# EAGLE board opk-pi-1wire-i2c (EAGLE 7.3.0)

Size 34.14 x 52.58 mm. Coordinates in mm from the lower left corner, seen from the top.
Outline: 0,0 34.14,0 34.14,52.58 0,52.58 0,0
Copper layers (1*16): Top 0.0356mm / dielectric 1.5011mm / Bottom 0.0356mm
Design rules "LaenPCBOrder": minimum track width 6mil, minimum drill 13mil, track to track 6mil, track to pad 6mil, pad to pad 6mil, via to via 6mil, smd to smd 6mil, copper to edge 15mil, drill to drill 6mil, minimum pad ring 7mil, minimum via ring 7mil, stop-mask expansion 3mil, vias tented up to drill 0mil, thermal gap 10mil
Net classes: 0 Default: width 0.203 mm; 1 vcc: width 0.203 mm

## Footprints (pad centres in the part's own frame; a part is rotated, then mirrored left to right if it is on the bottom)
SCREWTERMINAL-3.5MM-3 = drill 1.2 pad 2.413 square: 1 0,0 | drill 1.2 pad 2.413: 2 3.5,0; 3 7,0
0204/7 = drill 0.813 octagon: 1 -3.81,0; 2 3.81,0
MA04-2 = drill 1.016 octagon: 1 -3.81,-1.27; 2 -3.81,1.27; 3 -1.27,-1.27; 4 -1.27,1.27; 5 1.27,-1.27; 6 1.27,1.27; 7 3.81,-1.27; 8 3.81,1.27
MA05-2 = drill 1.016 octagon: 1 -5.08,-1.27; 2 -5.08,1.27; 3 -2.54,-1.27; 4 -2.54,1.27; 5 0,-1.27; 6 0,1.27; 7 2.54,-1.27; 8 2.54,1.27; 9 5.08,-1.27; 10 5.08,1.27
RJ45-8 = drill 1 square: 1 -4.445,6.35 | drill 1: 2 -3.175,8.89; 3 -1.905,6.35; 4 -0.635,8.89; 5 0.635,6.35; 6 1.905,8.89; 7 3.175,6.35; 8 4.445,8.89 | hole 3.2: -5.715,0; 5.715,0
RJ11-6 = drill 1.016 pad 1.88: 1 -3.175,8.89; 2 -1.905,6.35; 3 -0.635,8.89; 4 0.635,6.35; 5 1.905,8.89; 6 3.175,6.35 | hole 3.251: -5.08,0; 5.08,0

## Placement (x,y rotation side)
JP1  [SCREWTERMINAL-3.5MM-3]  3.81,50.04 270 top
JP2  [SCREWTERMINAL-3.5MM-3]  3.81,37.85 270 top
JP3  [SCREWTERMINAL-3.5MM-3]  3.81,25.65 270 top
JP4  [SCREWTERMINAL-3.5MM-3]  3.81,13.46 270 top
JP5  [SCREWTERMINAL-3.5MM-3]  30.2,27.69 90 top
JP6  [SCREWTERMINAL-3.5MM-3]  30.15,15.48 90 top
JP7  [SCREWTERMINAL-3.5MM-3]  30.12,3.2 90 top
R1  10k  [0204/7]  5.08,1.71 180 top
SV1  [MA04-2]  16.82,25.04 180 top
SV3  [MA05-2]  30.48,45.97 270 top
U1  RJ45  [RJ45-8]  17.07,41.59 180 top
U2  RJ11  [RJ11-6]  17.37,8.21 0 top

## Library data of the parts
JP1-JP7 U1 = SparkFun
R1 = rcl
SV1 SV3 = con-lstb; OC_FARNELL: unknown; OC_NEWARK: unknown
U2 = SparkFun-Connectors; PROD_ID: CONN-08590

## Nets
2-SDA: SV1.3 SV3.7
3-SCL: SV1.1 SV3.5
3V3: JP1.2 JP2.2 JP3.2 JP4.2 JP5.2 JP6.2 JP7.2 R1.2 SV1.7 SV3.9 U1.1 U2.1
4: JP1.3 JP2.3 JP3.3 JP4.3 JP5.3 JP6.3 JP7.3 SV3.3 U1.3 U1.4 U1.5 U1.6 U1.7 U1.8 U2.3 U2.4 U2.5 U2.6
5V: SV1.8 SV3.8 SV3.10
14-TX: SV1.4 SV3.4
15-RX: SV1.2 SV3.2
23: R1.1
GND: JP1.1 JP2.1 JP3.1 JP4.1 JP5.1 JP6.1 JP7.1 SV1.5 SV1.6 SV3.1 SV3.6 U1.2 U2.2

## Tracks (layer width: path | path; a pad name or v marks a point on that pad's centre or on a via)
2-SDA  (1 unrouted)
3-SCL  (1 unrouted)
3V3  (11 unrouted)
4  (17 unrouted)
5V  (2 unrouted)
14-TX  (1 unrouted)
15-RX  (1 unrouted)
GND  (12 unrouted)

## Text on the board
Dimension: G | + | S | OPK-1W | G | + | S | + | S | 3v3 | GND | 2-SD | 3-SC | G | G | + | S | 5V | TX | RX | + | S | GND | G | G | + | S | S | + | G